# Altium PCB High_freq_final.PcbDoc
Units mm, origin at the board's own origin, x right, y up, seen from the top; angles counter-clockwise.
Board outline 90 x 97 mm, 2 copper layers (Top Layer, Bottom Layer), stack 1.1 mm thick; 24 components, 15 nets, 53 pads, 4 vias.
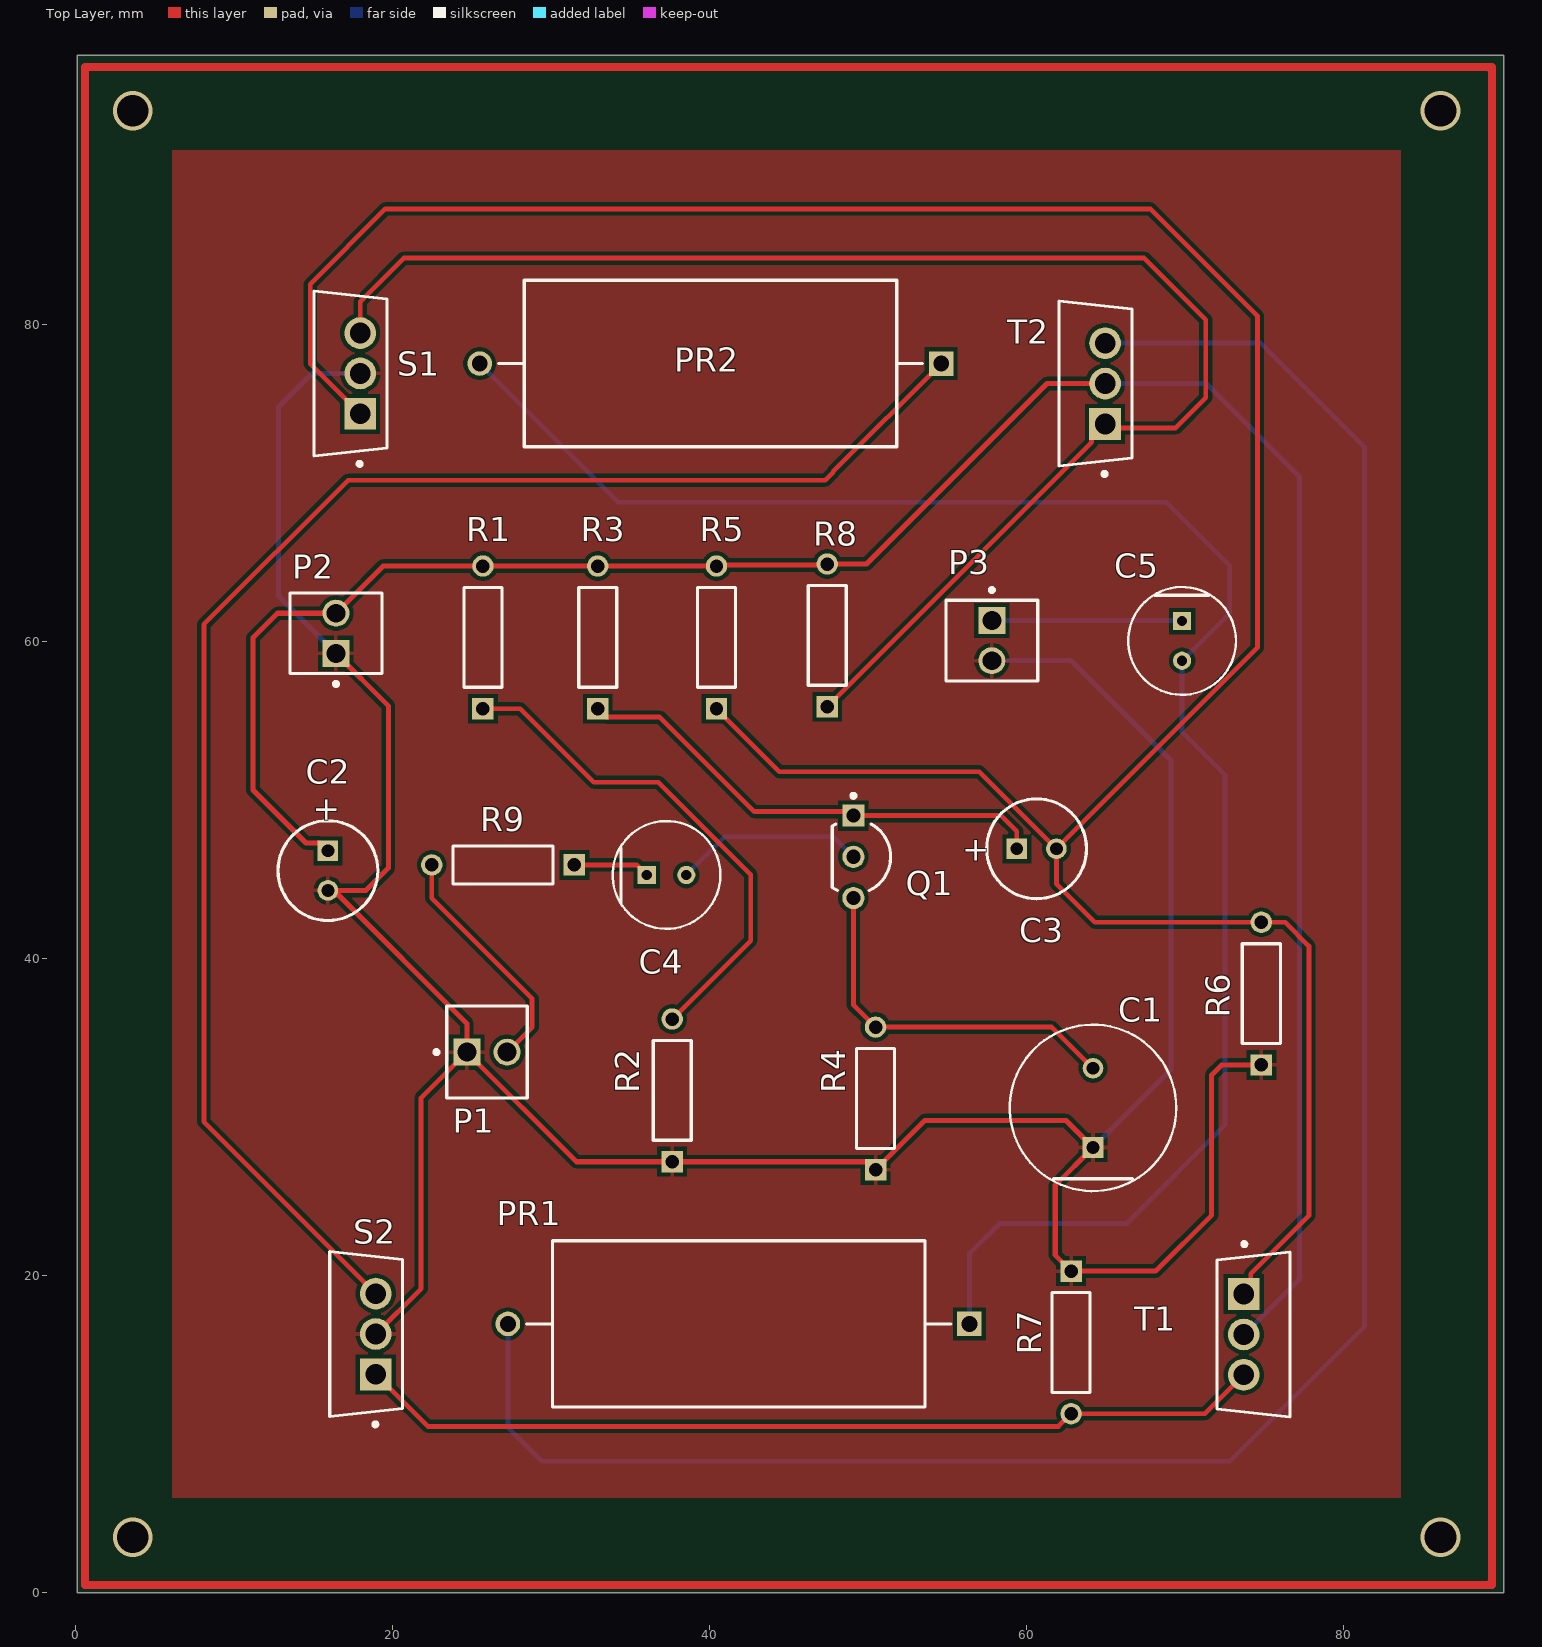
[diagram p0: Top Layer view]
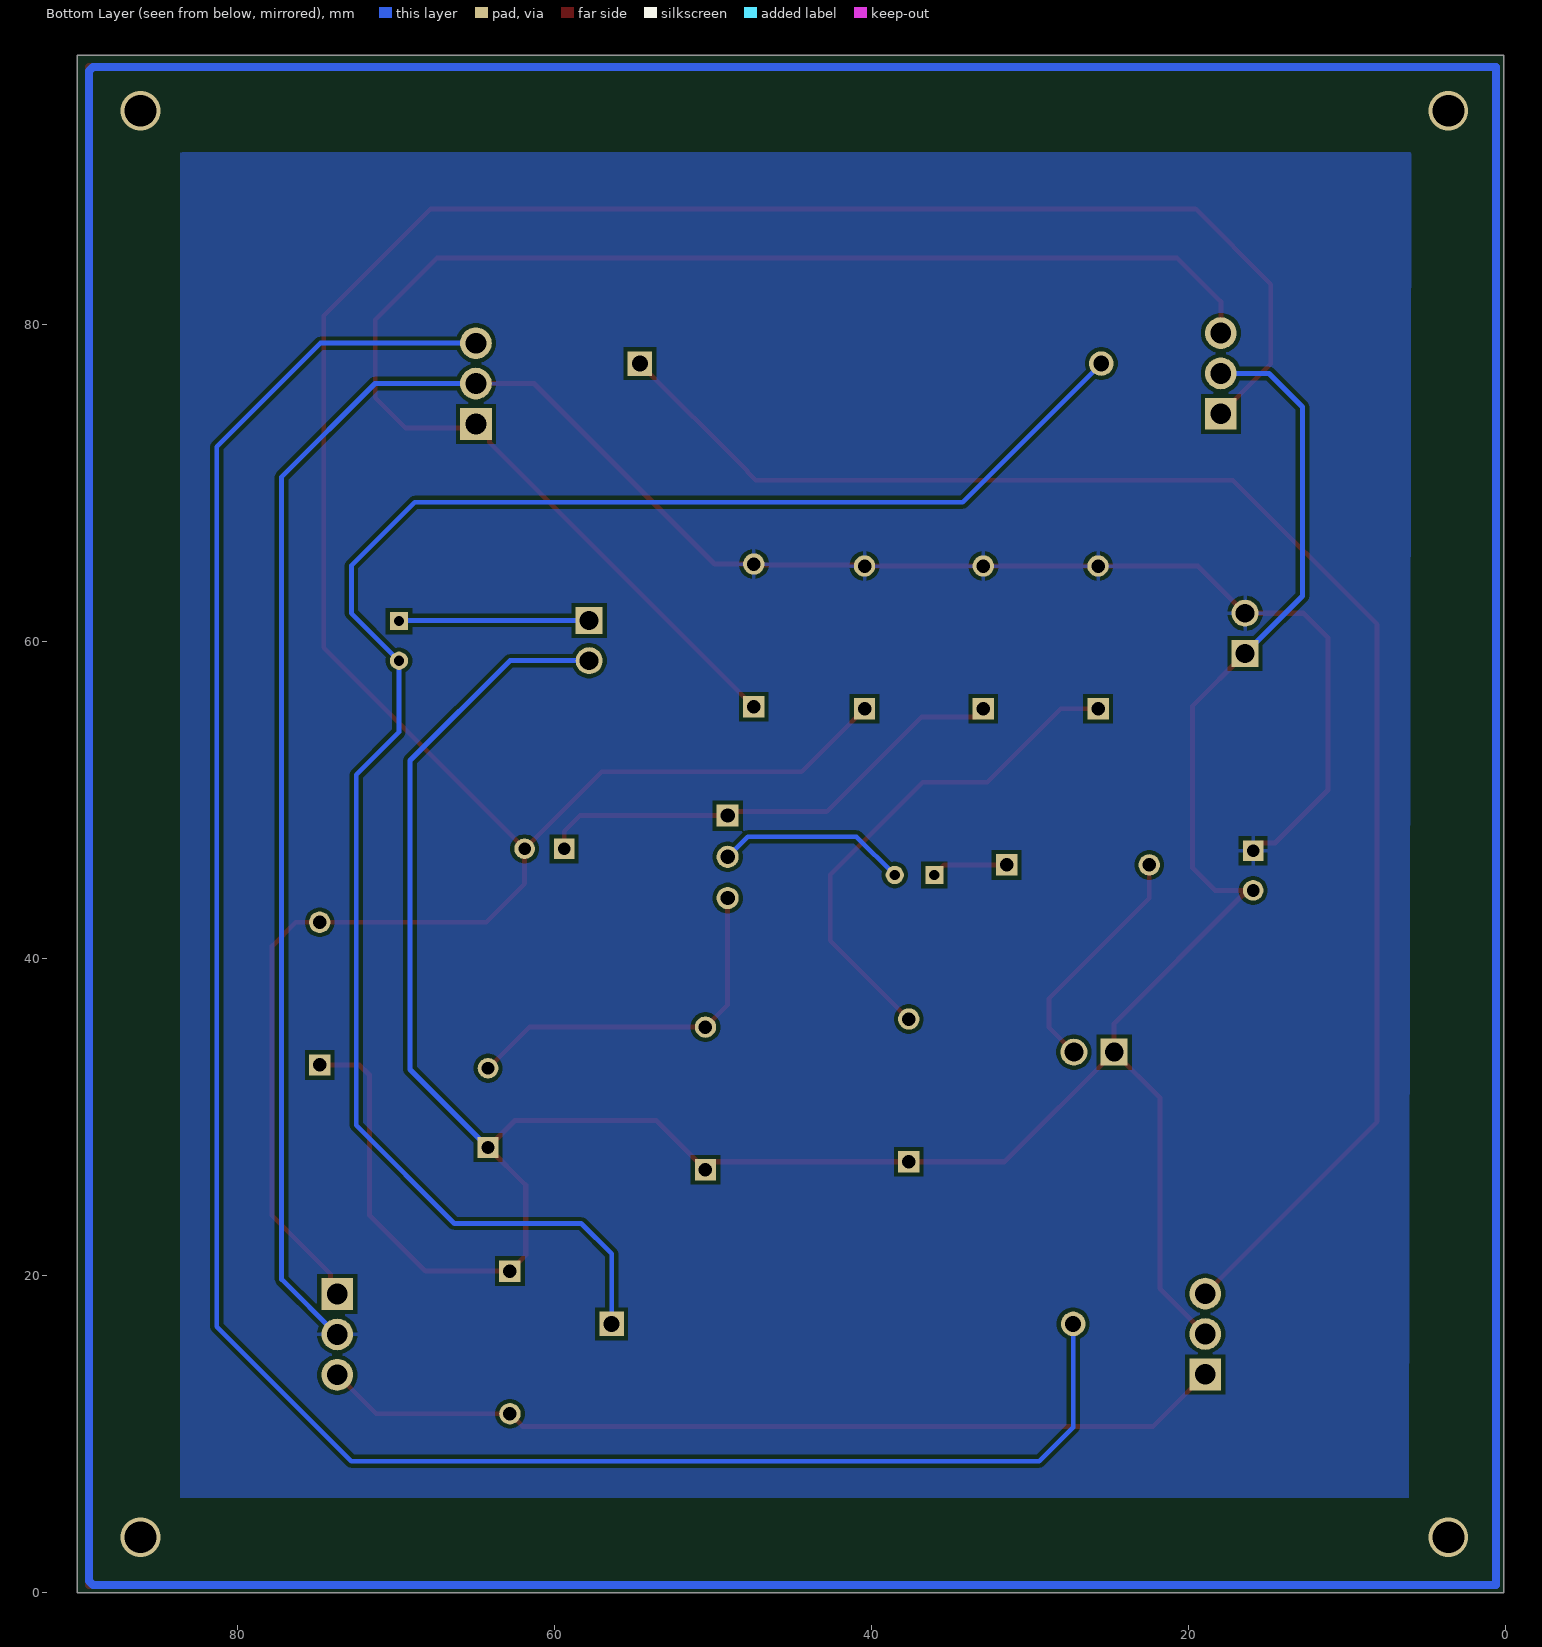
[diagram p1: Bottom Layer view, seen from below]
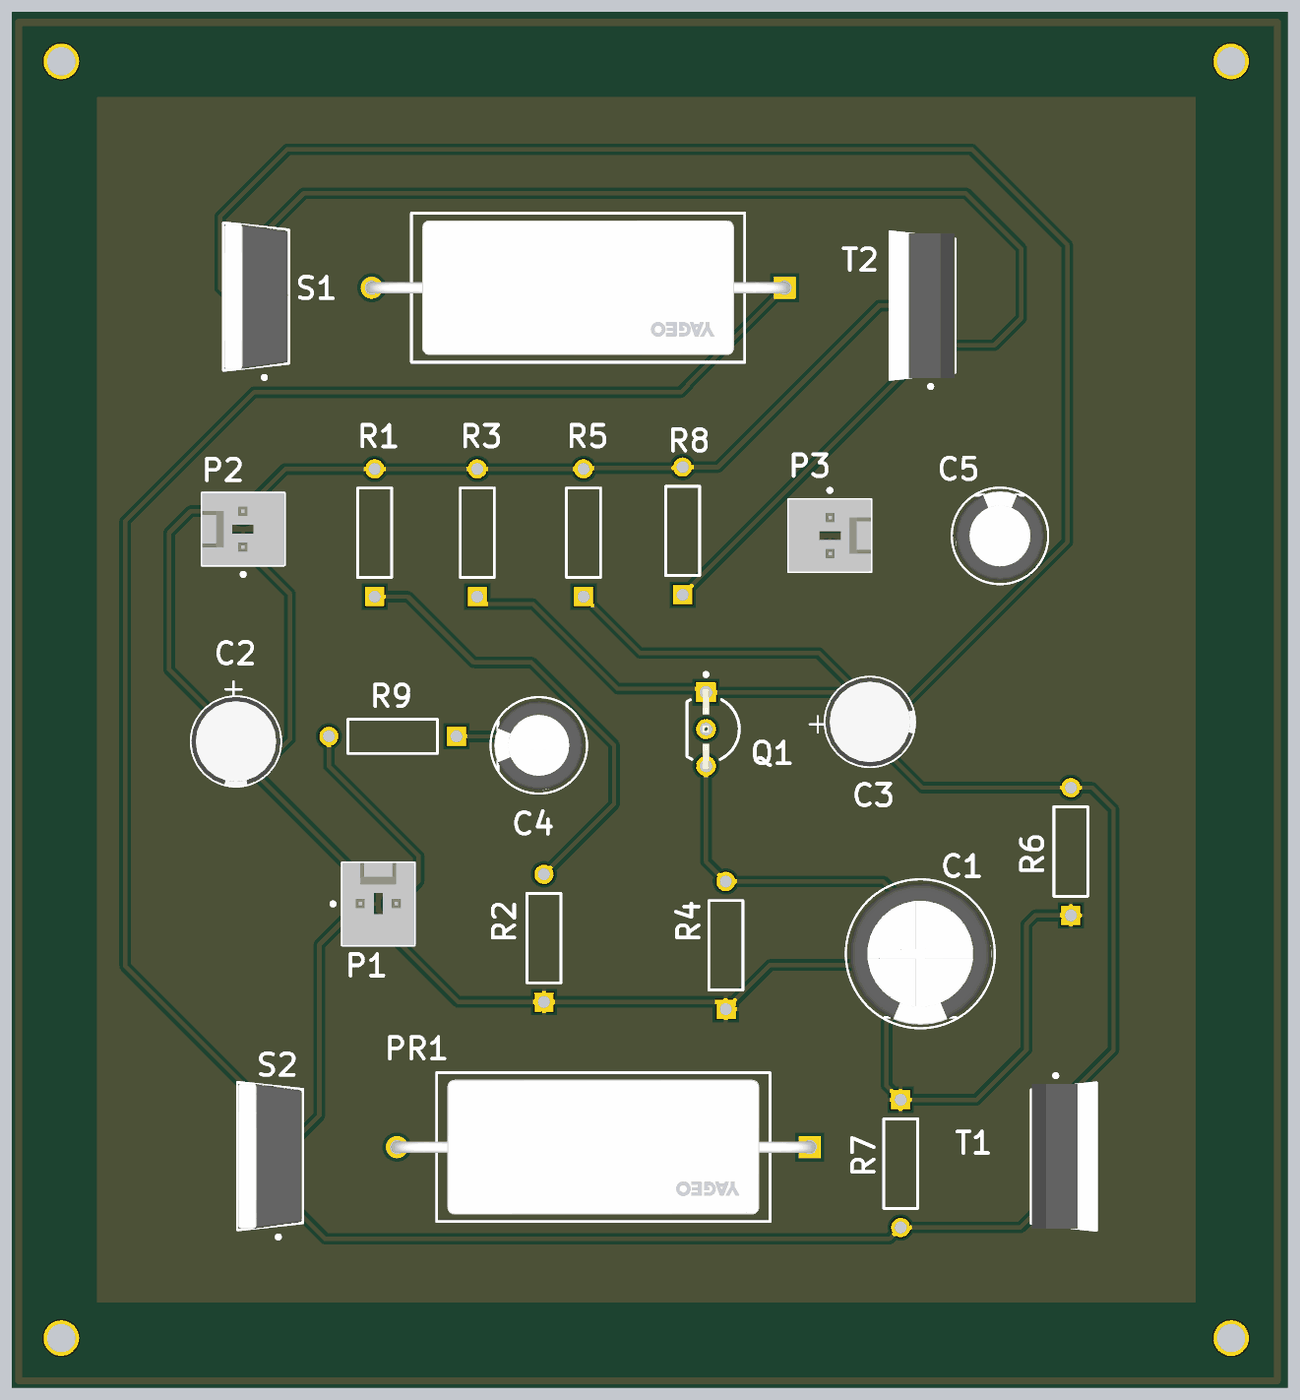
[diagram p2: 3D render of the assembled board from above, using the file's embedded part models]

## Layer stack, top to bottom
Top Solder: solder mask 0.05, SM-001, Dk 4
Top Layer: signal copper 0.1
Dielectric 1: dielectric 0.9, FR-4, Dk 4.8
Bottom Layer: signal copper 0.1
Bottom Solder: solder mask 0.05, SM-001, Dk 4

## Board outline
0.1,0 90.1,0 90.1,97 0.1,97

## Design rules (kind name [scope] priority, off if disabled: settings)
Clearance [All] p1: gap=0.25 ignorepadtopadclearanceinfootprint=FALSE
PolygonConnect [All] p1: connectstyle=Relief reliefconductorwidth=0.254 reliefentries=4 polygonreliefangle="90 Angle" airgapwidth=0.254
RoutingVias [All] p1: holewidth=0.4 width=0.5 viastyle="Through Hole" minholewidth=0.4 minwidth=0.5 maxholewidth=0.4 maxwidth=0.5
SolderMaskExpansion [All] p1: expansion=0.102 istentingtop=FALSE
Width WidthPWR [(InNet('GND') OR InNet('VCC'))] p1: maxlimit=0.32 minlimit=0.3 preferedwidth=0.32
Width [All] p2: maxlimit=0.5 minlimit=0.25 preferedwidth=0.3
30 further rules are at their usual default settings.

## Components (designator, comment, footprint, x,y, rotation, side; value= is the part's Value field where it differs from the comment)
C1 "EEUFK1C102" FP-RAD-TH-D_10_0_5-L_16_1-MFG 64.18,30.594 r90 top
C2 "ECA-1VM101" CAPPR55-250-1120X630X1220 15.92,45.56 r270 top
C3 "ECA-1VM101" CAPPR55-250-1120X630X1220 60.624,46.937 r0 top
C4 "EEAGA1A470" FP-RAD-TH-D_6_3_0_5-L_7_1-MFG 37.276,45.286 r0 top
C5 "EEAGA1A470" FP-RAD-TH-D_6_3_0_5-L_7_1-MFG 69.8,60.05 r270 top
P1 "22-27-2021" MOLX-22-27-2021_V 25.953,34.11 r0 top
P2 "22-27-2021" MOLX-22-27-2021_V 16.428,60.526 r90 top
P3 "22-27-2021" MOLX-22-27-2021_V 57.8,60.07 r270 top
PR1 "SQP500JB-1R2" FP-SQP500-MFG 41.828,16.965 r180 top value=1.2Ω
PR2 "SQP500JB-1R2" FP-SQP500-MFG 40.05,77.544 r180 top value=1.2Ω
Q1 "BC547BRL1G" ONSC-TO-92-3-29-11_AM_BL 49.067,46.429 r270 top
R1 "MFR-25FBF52-1K" RESA60-630X240 25.699,60.272 r90 top
R2 "MFR-25FBF52-1K" RESA60-630X240 37.637,31.697 r90 top
R3 "MFR-25FBF52-1K" RESA60-630X240 32.938,60.272 r90 top
R4 "MFR-25FBF52-1K" RESA60-630X240 50.464,31.189 r90 top
R5 "MFR-25FBF52-1K" RESA60-630X240 40.431,60.272 r90 top
R6 "MFR-25FBF52-1K" RESA60-630X240 74.8,37.8 r90 top
R7 "MFR-25FBF52-1K" RESA60-630X240 62.8,15.8 r270 top
R8 "MFR-25FBF52-1K" RESA60-630X240 47.416,60.399 r90 top
R9 "MFR-25FBF52-1K" RESA60-630X240 26.969,45.921 r180 top
S1 "TIP32C" FP-TO-220-P0A0015988-MFG 17.345,76.919 r180 top
S2 "TIP32C" FP-TO-220-P0A0015988-MFG 18.333,16.33 r180 top
T1 "TIP31C" FP-TO-220-P0A0015988-MFG 74.3,16.3 r0 top
T2 "TIP31C" FP-TO-220-P0A0015988-MFG 64.335,76.284 r180 top

## Footprints (in the part's own frame and the unit in brackets; to place one, negate y for a bottom-side part, rotate by r counter-clockwise, add the part's x,y. Pads: shape width x height; smd on the part's side, far side on the other; paste and mask are expansions set on the pad)
CAPPR55-250-1120X630X1220 [mm] "THD, 2-Leads, Dia 6.3mm, Body Length 11.2mm"
  rect 1.3x1.3 hole 0.8: 1(-1.25,0)
  round 1.3 hole 0.8: 2(1.25,0)
  silkscreen extent -3.15,-3.15 3.15,3.15, body extent -3.15,-3.15 3.16,3.15, height 12.21
FP-RAD-TH-D_6_3_0_5-L_7_1-MFG [mm]
  rect 1.15x1.15 hole 0.65 paste-1000 mask+0: 1(-1.25,0)
  round 1.15 hole 0.65 paste-1000 mask+0: 2(1.25,0)
  silkscreen extent -3.4,-3.4 3.4,3.4, body extent -3.5,-3.5 3.5,3.5, height 0.25
FP-RAD-TH-D_10_0_5-L_16_1-MFG [mm]
  rect 1.3x1.3 hole 0.8 paste-1000 mask+0: 1(-2.5,0)
  round 1.3 hole 0.8 paste-1000 mask+0: 2(2.5,0)
  silkscreen extent -5.25,-5.25 5.25,5.25, body extent -5.35,-5.35 5.35,5.35, height 0.25
FP-SQP500-MFG [mm]
  rect 1.55x1.55 hole 1 paste-1000 mask+0: 1(-14.555,0)
  round 1.55 hole 1 paste-1000 mask+0: 2(14.555,0)
  silkscreen extent -13.38,-5.25 13.38,5.25, body extent -15.43,-5.35 15.43,5.35, height 0.25
FP-TO-220-P0A0015988-MFG [mm]
  rect 2x2 hole 1.3 paste-1000 mask+0: 1(-0.607,2.55)
  round 2 hole 1.3 paste-1000 mask+0: 2(-0.607,0) 3(-0.607,-2.55)
  silkscreen extent -2.3,-5.2 2.3,5.82, body extent -2.4,-5.3 2.4,5.3, height 0.25
MOLX-22-27-2021_V [mm] "Header, 2-Leads, Body 5.8x5.08mm"
  rect 1.7x1.7 hole 1.19: 1(-1.27,0)
  round 1.7 hole 1.19: 2(1.27,0)
  silkscreen extent -3.31,-2.9 2.54,2.9, body extent -2.54,-2.9 2.54,2.9, height 11.72
ONSC-TO-92-3-29-11_AM_BL [mm] "TO, 3-Leads, Body Dia 4.7mm, Pitch 2.6mm"
  rect 1.4x1.4 hole 0.9: 1(-2.6,0)
  round 1.4 hole 0.9: 2(0,0) 3(2.6,0)
  silkscreen extent -3.97,-1.34 2.13,2.35, body extent -2.84,-1.34 2.84,2.35, height 5.33
RESA60-630X240 [mm] "Axial Resistor, 2-Leads, Dia 2.4mm, Body Length 6.3mm"
  rect 1.35x1.35 hole 0.85: 1(-4.5,0)
  round 1.35 hole 0.85: 2(4.5,0)
  silkscreen extent -3.15,-1.2 3.15,1.2, body extent -3.15,-1.2 3.15,1.2, height 2.4

## Part data
C1: library part CMP-05427-001094-1, "Aluminum Electrolytic Capacitors (Radial Lead Type) AEC-Q200 Qualified 1000uF ±20% 16V", Capacitance=1mF, Case/Package=Radial, Dielectric Material=Aluminium, Max Operating Temperature=105°C, Min Operating Temperature=-55°C, Ripple Current=1.24A, Tolerance=20%, Voltage=16V, Construction=RADIAL, Diameter=10mm, Height=16mm, Impedance=49mR, Lead Diameter=0.6mm, Lead Pitch=5mm, Life (Hours)=4000Hour, Mount="Through Hole", Number of Pins=2, Packaging=Bulk, Radiation Hardening=No, REACH SVHC="No SVHC", RoHS Compliant=Yes, Series="FK Radial", Termination=Radial, Voltage Rating=16V, Voltage Rating (DC)=16V
C2 C3: library part CMP-1665-00015-4, "Aluminum Electrolytic Capacitor (Radial Lead Type), 100 uF, 35 V, -40 to 85 degC, 2-Pin THD, RoHS, Bulk", Manufacturer=Panasonic, Max Operating Temperature="85 degC", Min Operating Temperature="-40 degC", Package Quantity=200, Voltage Rating="35 V", ComponentLink1Description="Manufacturer URL", ComponentLink1URL=http://www.panasonic.com/, ComponentLink2Description=Datasheet, ComponentLink2URL=http://industrial.panasonic.com/cdbs/www-data/pdf/RDF0000/ABA0000C1047.pdf, DatasheetVersion=03/2016, Height="11.2 mm", Lead Pitch="2.5 mm", Length="11.2 mm", Mount="Through Hole", Mounting Technology="Through Hole", PackageDescription="2-Pin Through Hole Device, Dia 6.3 mm, Body Length 11.2 mm", PackageReference=Radial, Packaging=Bulk, Pins=2, REACH SVHC="No SVHC", RoHSCompliant=true
  C2: cap=1uF
  C3: cap=100uF
C4: library part CMP-05427-001760-1, "Aluminum Electrolytic Capacitors (Radial Lead Type) 47uF ±20% 10V", Capacitance=4.7uF, Case/Package=Radial, Leakage Current=4.7uA, Max Operating Temperature=105°C, Min Operating Temperature=-55°C, Package Quantity=200, Ripple Current=65mA, Tolerance=20%, Voltage=10V, Construction=RADIAL, Diameter=6.3mm, Height=7mm, Height - Seated (Max)=0.276inch, Lead Diameter=0.45mm, Lead Pitch=2.5mm, Length=7mm, Life (Hours)=1000Hour, Mount="Through Hole", Number of Pins=2, Packaging=Bulk, Polarity=Polar, Radiation Hardening=No, REACH SVHC="No SVHC", RoHS Compliant=Yes, Series=GA, Termination=Radial, Voltage Rating=10V, Voltage Rating (DC)=10V
C5: library part CMP-05427-001760-1, "Aluminum Electrolytic Capacitors (Radial Lead Type) 47uF ±20% 10V", Capacitance=1uF, Case/Package=Radial, Leakage Current=4.7uA, Max Operating Temperature=105°C, Min Operating Temperature=-55°C, Package Quantity=200, Ripple Current=65mA, Tolerance=20%, Voltage=10V, Construction=RADIAL, Diameter=6.3mm, Height=7mm, Height - Seated (Max)=0.276inch, Lead Diameter=0.45mm, Lead Pitch=2.5mm, Length=7mm, Life (Hours)=1000Hour, Mount="Through Hole", Number of Pins=2, Packaging=Bulk, Polarity=Polar, Radiation Hardening=No, REACH SVHC="No SVHC", RoHS Compliant=Yes, Series=GA, Termination=Radial, Voltage Rating=10V, Voltage Rating (DC)=10V
P1 P2 P3: library part CMP-2000-05537-1, "Male Header, Pitch 2.54 mm, 1 x 2 Position, Height 11.7 mm, Tail Length 3.56 mm, 0 to 75 degC, RoHS, Bulk", Current - Max=4A, Manufacturer=Molex, Operating temperature=0°Cto+75°C, Package Description="2-Leads Header, Body 5.08 x 5.8 mm, Pitch 2.54 mm", Package Version="Rev. BC, 02/2012", PartNumber=0022272021, Voltage - Max=250V, Contact material=Tinplatedbrass, Current rating=4A, Datasheet URL=http://www.molex.com/pdm_docs/sd/022272021_sd.pdf, Datasheet Version="Rev. F, 06/2009", Housing material=Nylon(UL94V-0), Manufacturer URL=http://www.molex.com/, Mounting Technology=ThroughHole, No. of Positions=2, No. of Rows=1, Orientation=Vertical, Package Reference=22-27-2021, Pitch=2.54mm, Voltage Rating=250V
PR1 PR2: library part CMP-03413-000003-1, "RES 1.2 OHM 5W 5% AXIAL", Manufacturer=Yageo, Package=SQP500, Power Rating=5W, Resistance=2.2Ω, Temperature="-55°C to +155°C", Temperature Coefficient=300ppm/°C, Temperature Range High=+155°C, Temperature Range Low=-55°C, Tolerance=5%, Voltage Rating=350V, Automotive=No, Category=Res, ComponentLink2Description=Datasheet, ComponentLink2URL=https://datasheet.ciiva.com/2723/yageolr-sqpnsp-2013-2723111.pdf, Composition=Wirewound, Device Class L1="Passive Components", Device Class L2=Resistors, Device Class L3="Through-Hole Resistors", Digikey Description="RES 1.2 OHM 5W 5% AXIAL", Height=10mm, Ipc Land Pattern Name=RESAD2911W100L2350D1050, Lead Free=Yes, Manufacturer Part Number=SQP500JB-1R2, Octopart=https://octopart.com/sqp500jb-1r2-yageo-1162571, RoHS=TRUE, Series=SQP
Q1: library part CMP-1048-01605-1, "Amplifier Transistor, NPN Silicon, 3-Pin TO-92, Pb-Free, Tape and Reel", Manufacturer="On Semiconductor", ComponentLink1Description="Manufacturer URL", ComponentLink1URL=http://www.onsemi.com/, ComponentLink2Description=Datasheet, ComponentLink2URL=http://www.onsemi.com/pub_link/Collateral/BC546-D.PDF, ComponentLink3Description="Package Specification", ComponentLink3URL=http://www.onsemi.com/pub_link/Collateral/MAC97-D.PDF, DatasheetVersion="Rev. 7", fT Min (MHz)=150, IC Continuous (A)=0.1, Mounting Technology="Through Hole", PackageDescription="3-Pin Transistor Outline, Body 4.825 x 3.685 mm, Pitch 1.27 mm", PackageReference=TO-92-3-29-11_AM_BL, PackageVersion="Rev. AM", Packing="Tape and Reel", PartNumber=BC547BRL1G, Polarity=NPN, RoHS=TRUE
R1: library part CMP-1659-00075-1, "Axial Resistor, 1 KOhm, +/- 1%, 250 mW, -55 to 155 degC, 2-Pin THD, RoHS, Bulk", Case\Package=Axial, Max Operating Temperature="155 degC", Min Operating Temperature="-55 degC", Package Quantity=200, Power Rating="250 mW", Resistance="10 k", Tolerance=1%, Voltage Rating="250 V", ComponentLink1Description="Manufacturer URL", ComponentLink1URL=http://www.yageo.com/, ComponentLink2Description=Datasheet, ComponentLink2URL=http://www.yageo.com/documents/recent/Yageo%20LR_MFR_2013.pdf, DatasheetVersion=Apr-13, Length="0.248 inch", PackageDescription="2-Pin Axial Lead, Dia 2.4 mm, Body Length 6.3 mm", PackageReference=MFR-25, Packaging=Bulk, RoHSCompliant=true
R2 R5 R6: library part CMP-1659-00075-1, "Axial Resistor, 1 KOhm, +/- 1%, 250 mW, -55 to 155 degC, 2-Pin THD, RoHS, Bulk", Case\Package=Axial, Max Operating Temperature="155 degC", Min Operating Temperature="-55 degC", Package Quantity=200, Power Rating="250 mW", Resistance="2.2 k", Tolerance=1%, Voltage Rating="250 V", ComponentLink1Description="Manufacturer URL", ComponentLink1URL=http://www.yageo.com/, ComponentLink2Description=Datasheet, ComponentLink2URL=http://www.yageo.com/documents/recent/Yageo%20LR_MFR_2013.pdf, DatasheetVersion=Apr-13, Length="0.248 inch", PackageDescription="2-Pin Axial Lead, Dia 2.4 mm, Body Length 6.3 mm", PackageReference=MFR-25, Packaging=Bulk, RoHSCompliant=true
R3: library part CMP-1659-00075-1, "Axial Resistor, 1 KOhm, +/- 1%, 250 mW, -55 to 155 degC, 2-Pin THD, RoHS, Bulk", Case\Package=Axial, Max Operating Temperature="155 degC", Min Operating Temperature="-55 degC", Package Quantity=200, Power Rating="250 mW", Resistance=240ohm, Tolerance=1%, Voltage Rating="250 V", ComponentLink1Description="Manufacturer URL", ComponentLink1URL=http://www.yageo.com/, ComponentLink2Description=Datasheet, ComponentLink2URL=http://www.yageo.com/documents/recent/Yageo%20LR_MFR_2013.pdf, DatasheetVersion=Apr-13, Length="0.248 inch", PackageDescription="2-Pin Axial Lead, Dia 2.4 mm, Body Length 6.3 mm", PackageReference=MFR-25, Packaging=Bulk, RoHSCompliant=true
R4 R7: library part CMP-1659-00075-1, "Axial Resistor, 1 KOhm, +/- 1%, 250 mW, -55 to 155 degC, 2-Pin THD, RoHS, Bulk", Case\Package=Axial, Max Operating Temperature="155 degC", Min Operating Temperature="-55 degC", Package Quantity=200, Power Rating="250 mW", Resistance=68ohm, Tolerance=1%, Voltage Rating="250 V", ComponentLink1Description="Manufacturer URL", ComponentLink1URL=http://www.yageo.com/, ComponentLink2Description=Datasheet, ComponentLink2URL=http://www.yageo.com/documents/recent/Yageo%20LR_MFR_2013.pdf, DatasheetVersion=Apr-13, Length="0.248 inch", PackageDescription="2-Pin Axial Lead, Dia 2.4 mm, Body Length 6.3 mm", PackageReference=MFR-25, Packaging=Bulk, RoHSCompliant=true
R8: library part CMP-1659-00075-1, "Axial Resistor, 1 KOhm, +/- 1%, 250 mW, -55 to 155 degC, 2-Pin THD, RoHS, Bulk", Case\Package=Axial, Max Operating Temperature="155 degC", Min Operating Temperature="-55 degC", Package Quantity=200, Power Rating="250 mW", Resistance="68 ohm", Tolerance=1%, Voltage Rating="250 V", ComponentLink1Description="Manufacturer URL", ComponentLink1URL=http://www.yageo.com/, ComponentLink2Description=Datasheet, ComponentLink2URL=http://www.yageo.com/documents/recent/Yageo%20LR_MFR_2013.pdf, DatasheetVersion=Apr-13, Length="0.248 inch", PackageDescription="2-Pin Axial Lead, Dia 2.4 mm, Body Length 6.3 mm", PackageReference=MFR-25, Packaging=Bulk, RoHSCompliant=true
R9: library part CMP-1659-00075-1, "Axial Resistor, 1 KOhm, +/- 1%, 250 mW, -55 to 155 degC, 2-Pin THD, RoHS, Bulk", Case\Package=Axial, Max Operating Temperature="155 degC", Min Operating Temperature="-55 degC", Package Quantity=200, Power Rating="250 mW", Resistance="1.1 k", Tolerance=1%, Voltage Rating="250 V", ComponentLink1Description="Manufacturer URL", ComponentLink1URL=http://www.yageo.com/, ComponentLink2Description=Datasheet, ComponentLink2URL=http://www.yageo.com/documents/recent/Yageo%20LR_MFR_2013.pdf, DatasheetVersion=Apr-13, Length="0.248 inch", PackageDescription="2-Pin Axial Lead, Dia 2.4 mm, Body Length 6.3 mm", PackageReference=MFR-25, Packaging=Bulk, RoHSCompliant=true
S1 S2: library part CMP-12195-000005-1, "TRANS PNP 100V 3A TO-220", Collector Base Voltage=-100V, Collector Emitter Saturation Voltage=-1.2V, Emitter Base Voltage=-5V, Manufacturer=STMicroelectronics, Max Collector Current=-3A, Max Junction Temp=+150°C, Package=TO-220-P0A0015988, Power Dissipation=2W, Temperature="to +150°C", Automotive=No, Category=Trans, Collector Emitter Voltage=-100V, ComponentLink2Description=Datasheet, ComponentLink2URL=https://www.st.com/resource/en/datasheet/tip32c.pdf, Device Class L1="Discrete Semiconductors", Device Class L2=Transistors, Device Class L3=BJTs, Digikey Description="TRANS PNP 100V 3A TO-220", Height=19.68mm, Hfe Max=50, Hfe Min=10, Hfe Testic=-3A, Hfe Testvce=-4V, Lead Free=Yes, Manufacturer Part Number=TIP32C, Mouser Description="Original ST Microelectronics Transistor, 100V, 3A, .22 Ohm, TO-220 Package", Number Of Elements=1, Number Of Pnp=1, Octopart=https://octopart.com/tip32c-stmicroelectronics-353617, RoHS=TRUE, Standoff Height=3.5mm, Temperature Range High=+150°C
T1 T2: library part CMP-12195-000001-1, "TRANS NPN 100V 3A TO-220", Collector Base Voltage=100V, Collector Emitter Saturation Voltage=1.2V, Emitter Base Voltage=5V, Manufacturer=STMicroelectronics, Max Collector Current=3A, Max Junction Temp=+150°C, Package=TO-220-P0A0015988, Power Dissipation=2W, Temperature="to +150°C", Automotive=No, Category=Trans, Collector Emitter Voltage=100V, ComponentLink2Description=Datasheet, ComponentLink2URL=https://www.st.com/resource/en/datasheet/tip31c.pdf, Device Class L1="Discrete Semiconductors", Device Class L2=Transistors, Device Class L3=BJTs, Digikey Description="TRANS NPN 100V 3A TO-220", Height=19.68mm, Hfe Max=50, Hfe Min=10, Hfe Testic=3A, Hfe Testvce=4V, Lead Free=Yes, Manufacturer Part Number=TIP31C, Mouser Description="Bipolar Transistors - BJT NPN Gen Pur Power", Number Of Elements=1, Number Of Npn=1, Octopart=https://octopart.com/tip31c-stmicroelectronics-15555, RoHS=TRUE, Standoff Height=3.5mm, Temperature Range High=+150°C

## Via types
v1: diameter 2.5, hole 2, Top Layer to Bottom Layer, 4 vias

## Nets (pads, with @x,y where several pads share a name; then routed paths per layer and width w, separated by ;. In a path a pad name is that pad's centre, name@x,y a point inside that pad or via, vN(x,y) a via of type N, cw(c..) or ccw(c..) an arc to the next point about the centre after c; other vN are vias at no path point)
GND: C1.1 C2.2 P1.1 P2.1 P3.2 R2.1 R4.1 R6.1 R7.1 S1.2 S2.2 | length 192.9
  Top Layer w0.32: C2.2 C2.2@16.29,44.31 ; P2.1 19.73,55.954 19.73,45.727 18.313,44.31 C2.2@16.29,44.31 ; S2.2 21.8,19.189 21.8,31.227 P1.1 ; R6.1 72.3,33.3 71.664,32.664 71.664,23.828 68.136,20.3 R7.1 61.8,21.3 61.8,25.714 C1.1 62.474,29.8 53.575,29.8 R4.1 49.956,27.197 R2.1 31.596,27.197 P1.1 ; C2.2@16.29,44.31 16.29,44.205 16.479,44.016 16.584,44.016 24.683,35.917 P1.1
  Bottom Layer w0.32: P2.1 12.8,62.884 12.8,74.8 14.919,76.919 S1.2 ; P3.2 62.8,58.8 69.1,52.5 69.1,33.014 C1.1
NetC1_2: C1.2 Q1.3 R4.2 | length 23.5
  Top Layer w0.3: Q1.3 49.067,37.086 R4.2 61.585,35.689 C1.2
NetC3_1: C3.1 Q1.1 R3.1 | length 30.7
  Top Layer w0.3: R3.1 33.463,55.247 36.853,55.247 42.817,49.283 48.813,49.283 Q1.1 58.382,49.029 59.374,48.037 C3.1
NetC3_2: C3.2 R5.1 R6.2 S1.1 T1.1 | length 181.4
  Top Layer w0.3: S1.1 14.8,77.521 14.8,82.55 19.55,87.3 67.8,87.3 74.55,80.55 74.55,59.613 C3.2 ; R5.1 44.403,51.8 57.011,51.8 C3.2 ; T1.1 74.124,19.282 74.124,20.124 77.8,23.8 77.8,40.8 76.3,42.3 R6.2 64.3,42.3 61.874,44.726 C3.2
NetC4_1: C4.1 R9.1 | length 4.8
  Top Layer w0.3: R9.1 35.391,45.921 C4.1
NetC4_2: C4.2 Q1.2 | length 12.1
  Bottom Layer w0.3: C4.2 40.939,47.699 47.797,47.699 Q1.2
NetC5_1: C5.1 P3.1 | length 12
  Bottom Layer w0.3: P3.1 69.76,61.34 C5.1
NetC5_2: C5.2 PR1.1 PR2.2 | length 114.1
  Bottom Layer w0.3: PR2.2 34.239,68.8 68.8,68.8 72.8,64.8 72.8,61.8 C5.2 69.8,54.3 72.5,51.6 72.5,29.5 66.3,23.3 58.3,23.3 56.383,21.383 PR1.1
NetP1_2: P1.2 R9.2 | length 15.1
  Top Layer w0.3: R9.2 22.469,43.817 28.8,37.486 28.8,35.687 P1.2
NetPR1_2: PR1.2 T2.3 | length 139.5
  Bottom Layer w0.3: PR1.2 27.273,10.438 29.411,8.3 72.8,8.3 81.3,16.8 81.3,72.3 74.766,78.834 T2.3
NetPR2_1: PR2.1 S2.3 | length 100
  Top Layer w0.3: S2.3 8.1,29.72 8.1,61.088 17.19,70.178 47.289,70.178 47.797,70.686 47.797,70.736 PR2.1
NetR1_1: R1.1 R2.2 | length 32.4
  Top Layer w0.3: R1.1 28.04,55.772 32.684,51.128 36.772,51.128 42.59,45.31 42.59,41.15 R2.2
NetR7_2: R7.2 S2.1 T1.3 | length 57.5
  Top Layer w0.3: S2.1 22.221,10.5 62,10.5 R7.2 71.243,11.3 T1.3
NetR8_1: R8.1 S1.3 T2.1 | length 95.3
  Top Layer w0.3: S1.3 17.952,81.452 20.7,84.2 67.4,84.2 71.3,80.3 71.3,75.393 69.387,73.48 65.196,73.48 T2.1 64.092,72.884 64.092,72.575 R8.1
VCC: C2.1 P2.2 R1.2 R3.2 R5.2 R8.2 T1.2 T2.2 | length 146.6
  Top Layer w0.32: C2.1 15.43,47.3 14.541,47.3 11.2,50.641 11.2,60.251 12.745,61.796 P2.2 19.404,64.772 R1.2 R3.2 R5.2 40.495,64.835 47.353,64.835 R8.2 49.899,64.899 61.284,76.284 T2.2
  Bottom Layer w0.32: T2.2 71.316,76.284 77.2,70.4 77.2,19.778 73.722,16.3 T1.2
copper on no net: | length 737.7
  Top Layer w0.5: 0.6,0.5 0.6,96.25 89.35,96.25 89.35,0.5 0.6,0.5
  Bottom Layer w0.5: 0.6,0.5 0.6,96.25 89.1,96.25 89.35,96 89.35,0.75 89.1,0.5 0.6,0.5
  other v1: 3.6,3.5 86.1,3.5 3.6,93.5 86.1,93.5

## Polygon pours and split planes (outlines as drawn)
GND on Top Layer "GND_L01_P000" (solid, remove dead copper, pour order 0): 6.1,91 83.6,91 83.6,6 6.1,6
VCC on Bottom Layer "VCC_L02_P001" (solid, remove dead copper, pour order 1): 5.934,90.882 83.482,90.882 83.6,91 83.6,6 6.1,6

## Text inside footprints (layer, text, board x,y; h text height)
C2: Top Overlay "+" at 15.17,50.26 h1.5 r270
C3: Top Overlay "+" at 55.924,46.187 h1.5